# EAGLE board tulip breakout (EAGLE 9.6.2)
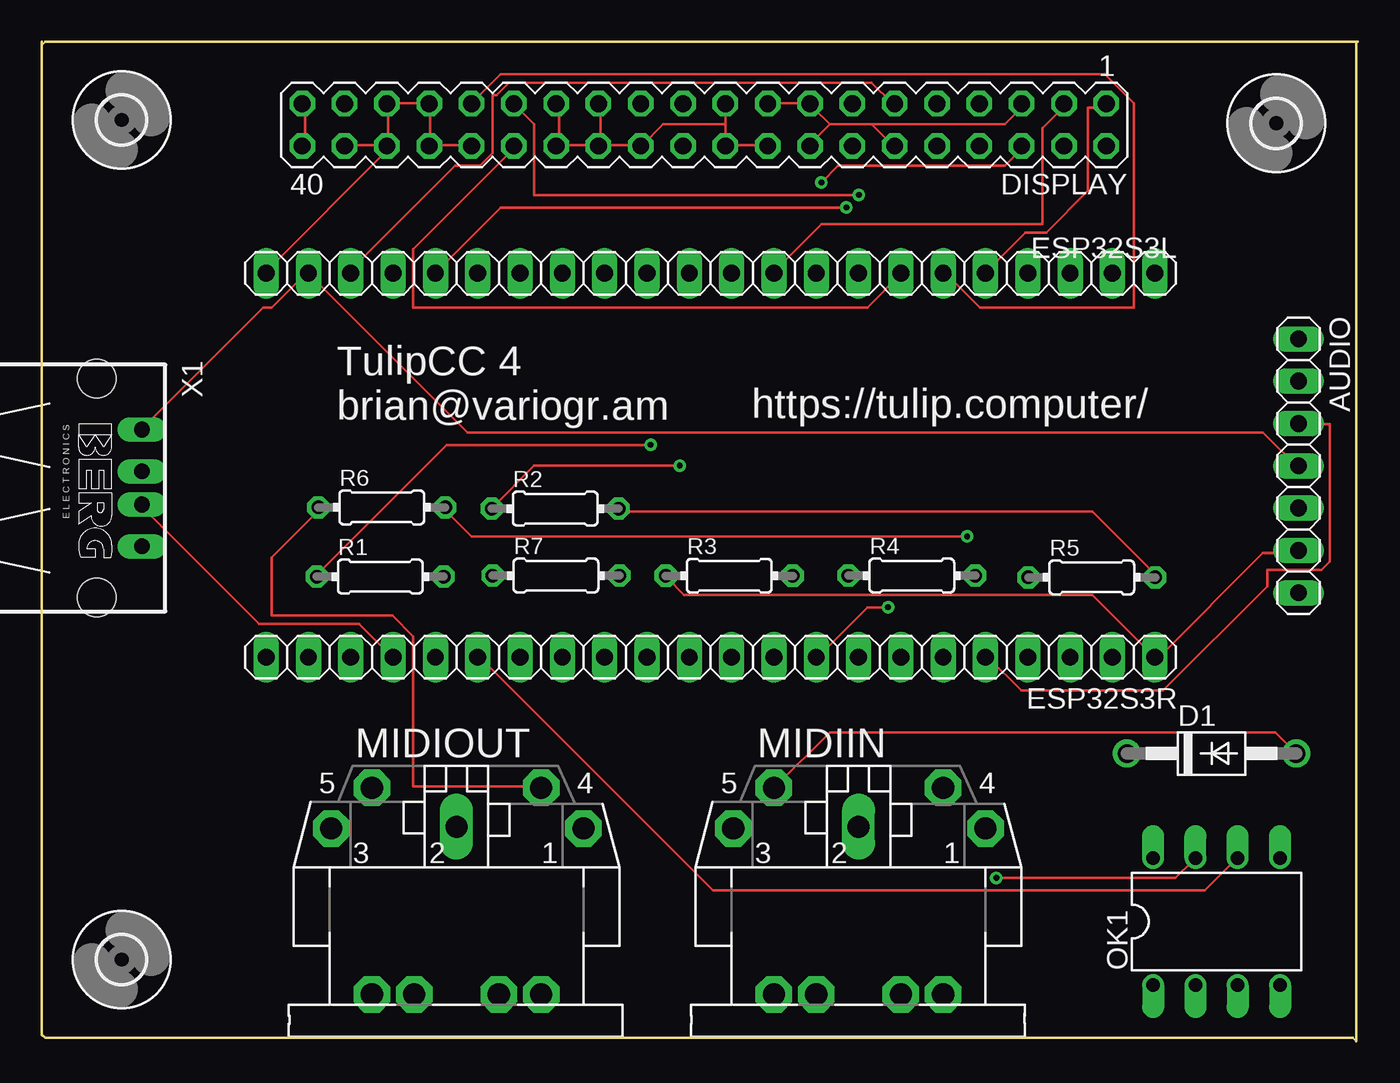
[diagram p0: board, top side]
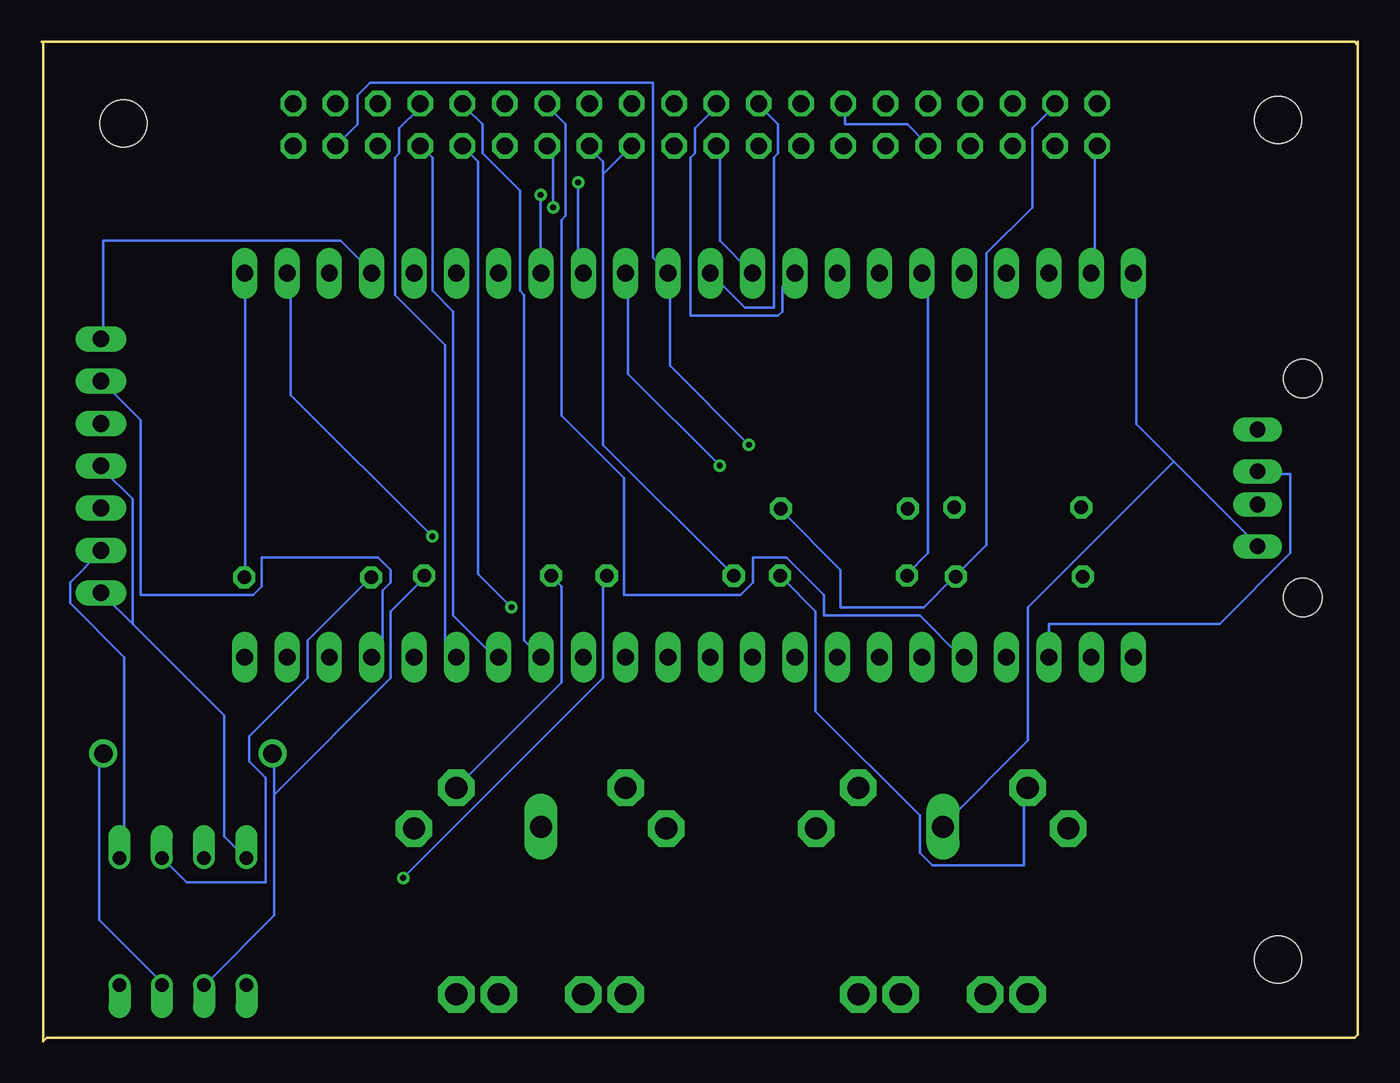
[diagram p1: board, bottom side, seen from below]

Size 79 x 60 mm. Coordinates in mm from the lower left corner, seen from the top.
Outline: 0,60 0,59.8
Outline: 0,59.8 0,0.4 0.2,0.2 78.7,0.2 78.9,0 78.9,59.9 79,60 0.2,60 0,59.8
Copper layers (1*16): Top 0.035mm / dielectric 0.15mm / Bottom 0.035mm
Design rules "default *": minimum track width 6mil, minimum drill 0.35mm, track to track 10mil, track to pad 10mil, pad to pad 10mil, via to via 10mil, smd to smd 10mil, copper to edge 40mil, drill to drill 6mil, minimum pad ring 10mil, minimum via ring 8mil, stop-mask expansion 4mil, vias tented up to drill 0mil, thermal gap 10mil

## Footprints (pad centres in the part's own frame; a part is rotated, then mirrored left to right if it is on the bottom)
1X07 = drill 1.016 long: 1 -7.62,0; 2 -5.08,0; 3 -2.54,0; 4 0,0; 5 2.54,0; 6 5.08,0; 7 7.62,0
DO41-10 = drill 1.118: A 5.08,0; C -5.08,0
MA20-2 = drill 1.016 octagon: 1 -24.13,-1.27; 2 -24.13,1.27; 3 -21.59,-1.27; 4 -21.59,1.27; 5 -19.05,-1.27; 6 -19.05,1.27; 7 -16.51,-1.27; 8 -16.51,1.27; 9 -13.97,-1.27; 10 -13.97,1.27; 11 -11.43,-1.27; 12 -11.43,1.27; 13 -8.89,-1.27; 14 -8.89,1.27; 15 -6.35,-1.27; 16 -6.35,1.27; 17 -3.81,-1.27; 18 -3.81,1.27; 19 -1.27,-1.27; 20 -1.27,1.27; 21 1.27,-1.27; 22 1.27,1.27; 23 3.81,-1.27; 24 3.81,1.27; 25 6.35,-1.27; 26 6.35,1.27; 27 8.89,-1.27; 28 8.89,1.27; 29 11.43,-1.27; 30 11.43,1.27; 31 13.97,-1.27; 32 13.97,1.27; 33 16.51,-1.27; 34 16.51,1.27; 35 19.05,-1.27; 36 19.05,1.27; 37 21.59,-1.27; 38 21.59,1.27; 39 24.13,-1.27; 40 24.13,1.27
1X22 = drill 1.016 long: 1 -26.67,0; 2 -24.13,0; 3 -21.59,0; 4 -19.05,0; 5 -16.51,0; 6 -13.97,0; 7 -11.43,0; 8 -8.89,0; 9 -6.35,0; 10 -3.81,0; 11 -1.27,0; 12 1.27,0; 13 3.81,0; 14 6.35,0; 15 8.89,0; 16 11.43,0; 17 13.97,0; 18 16.51,0; 19 19.05,0; 20 21.59,0; 21 24.13,0; 22 26.67,0
2,8 = hole 2.8: 0,0
CP-2350 = drill 1.321 pad 2.184 octagon: 1 7.62,12.58; 3 -7.52,12.58; 4 5.08,15.02; 5 -5.08,15.02; PE -2.54,2.62; PE1 -5.08,2.62; PE2 5.08,2.62; PE@ 2.54,2.62 | drill 1.321 long: 2 0,12.68
DIL08 = drill 0.813 offset: 1 -3.81,-3.81; 2 -1.27,-3.81; 3 1.27,-3.81; 4 3.81,-3.81; 5 3.81,3.81; 6 1.27,3.81; 7 -1.27,3.81; 8 -3.81,3.81
0204/7 = drill 0.813 octagon: 1 -3.81,0; 2 3.81,0
PN87520 = drill 0.95 long: 1 -3.5,2.71; 2 -1,2.71; 3 1,2.71; 4 3.5,2.71 | hole 2.3: -6.57,0; 6.57,0

## Placement (x,y rotation side)
AUDIO  [1X07]  75.44,34.54 270 top
D1  1N4004  [DO41-10]  70.22,17.27 0 top
DISPLAY  [MA20-2]  39.77,55.01 180 top
ESP32S3L  [1X22]  40.14,46.1 180 top
ESP32S3R  [1X22]  40.14,23.05 180 top
H1  MOUNT-HOLE2.8  [2,8]  4.8,4.9 0 top
H2  MOUNT-HOLE2.8  [2,8]  74.1,55.1 0 top
H3  MOUNT-HOLE2.8  [2,8]  4.8,55.3 0 top
MIDIIN  MIDIJACK  [CP-2350]  49.03,0.19 0 top
MIDIOUT  MIDIJACK  [CP-2350]  24.9,0.19 0 top
OK1  6N138  [DIL08]  70.52,7.18 0 top
R1  4.7K  [0204/7]  20.32,27.89 0 top
R2  4.7K  [0204/7]  30.82,31.97 0 top
R3  4.7K  [0204/7]  41.27,27.94 0 top
R4  220  [0204/7]  52.23,27.95 0 top
R5  470  [0204/7]  63.03,27.84 0 top
R6  33  [0204/7]  20.41,32.04 0 top
R7  10  [0204/7]  30.87,27.95 0 top
X1  [PN87520]  3.31,33.21 270 top

## Library data of the parts
AUDIO ESP32S3L ESP32S3R = pinhead
D1 = diode
DISPLAY = con-lstb; OC_FARNELL: unknown; OC_NEWARK: unknown
H1-H3 = holes
MIDIIN MIDIOUT = adafruit
OK1 = optocoupler; MF: VISHAY/TELEFUNKEN; MPN: 6N138; OC_FARNELL: 9860150; OC_NEWARK: 35K5294
R1-R7 = rcl; SPICEPREFIX: R
X1 = con-berg; OC_FARNELL: unknown; OC_NEWARK: unknown

## Nets
GND: AUDIO.6 DISPLAY.5 DISPLAY.12 DISPLAY.15 DISPLAY.16 DISPLAY.17 DISPLAY.18 DISPLAY.19 DISPLAY.20 DISPLAY.24 DISPLAY.25 DISPLAY.26 DISPLAY.27 DISPLAY.28 DISPLAY.32 DISPLAY.33 DISPLAY.34 DISPLAY.35 DISPLAY.36 DISPLAY.38 ESP32S3L.22 ESP32S3R.1 MIDIOUT.2 OK1.5 R3.1 X1.4
N$1: DISPLAY.6 ESP32S3L.9
N$2: DISPLAY.7 ESP32S3R.6
N$3: DISPLAY.8 ESP32S3R.7
N$4: DISPLAY.9 ESP32S3R.8
N$6: DISPLAY.10 ESP32S3R.9
N$7: DISPLAY.11 ESP32S3L.20
N$8: DISPLAY.13 ESP32S3R.18
N$9: DISPLAY.14 ESP32S3L.18
N$10: AUDIO.4 AUDIO.7 DISPLAY.39 DISPLAY.40 ESP32S3L.21 OK1.8 X1.1
N$11: DISPLAY.21 ESP32S3L.14
N$12: DISPLAY.22 ESP32S3L.13
N$13: DISPLAY.23 ESP32S3L.12
N$14: DISPLAY.29 ESP32S3L.8
N$15: DISPLAY.30 ESP32S3L.7
N$16: DISPLAY.31 ESP32S3L.6
N$17: DISPLAY.37 ESP32S3L.1 R1.2 R2.2 R5.2
N$18: DISPLAY.4 ESP32S3L.11 R1.1
N$19: ESP32S3R.17 OK1.6 R5.1
N$20: DISPLAY.1 ESP32S3L.5
N$21: AUDIO.1 ESP32S3L.4
N$22: AUDIO.2 ESP32S3R.4
N$23: AUDIO.3 ESP32S3R.5
N$24: ESP32S3R.20 X1.2
N$25: ESP32S3R.19 X1.3
N$26: DISPLAY.3 ESP32S3L.10 R2.1
N$27: ESP32S3L.17 R7.1
N$29: MIDIIN.4 R4.1
N$30: D1.C OK1.2 R4.2
N$31: D1.A MIDIIN.5 OK1.3
N$32: OK1.7 R3.2
N$34: MIDIOUT.5 R7.2
N$35: MIDIOUT.4 R6.1
N$36: ESP32S3L.2 R6.2

## Tracks (layer width: path | path; a pad name or v marks a point on that pad's centre or on a via)
GND
  Top 0.152: AUDIO.6 75.3,29.3 73.3,29.3 67.05,23.05 ESP32S3R.1 63.05,26.8 38.55,26.8 37.55,27.8 R3.1 | 49.8,55.05 51.05,53.8 DISPLAY.12 | 47.3,55.05 49.8,55.05 | 47.3,55.05 46.3,56.05 DISPLAY.15 46.05,56.3 43.8,56.3 DISPLAY.17 | 49.8,55.05 57.8,55.05 58.8,56.05 DISPLAY.5 | DISPLAY.38 18.3,53.8 20.55,53.8 DISPLAY.36 | 23.3,53.8 23.3,56.05 DISPLAY.33 23.05,56.3 20.8,56.3 DISPLAY.35 20.8,56.05 20.8,53.8 DISPLAY.36 | 23.3,53.8 25.8,53.8 DISPLAY.32 | 23.3,53.8 DISPLAY.34 | 31.05,53.8 31.05,56.05 DISPLAY.27 | 33.55,53.8 33.55,56.05 DISPLAY.25 | 33.55,53.8 35.8,53.8 DISPLAY.24 36.05,53.8 37.3,55.05 41.05,55.05 | 33.55,53.8 DISPLAY.26 33.3,53.8 31.05,53.8 | 31.05,53.8 DISPLAY.28 | 41.05,55.05 41.05,56.05 DISPLAY.19 | 41.05,55.05 41.05,53.8 | 41.05,53.8 43.55,53.8 DISPLAY.18 | 41.05,53.8 DISPLAY.20 | 47.3,55.05 46.05,53.8 DISPLAY.16 | ESP32S3L.22 13.55,46.3 20.8,53.55 DISPLAY.36
  Bottom 0.152: 11.05,34.8 13.3,37.05 13.3,46.05 ESP32S3L.22 | 11.05,34.8 6.05,29.8 X1.4 | 11.05,34.8 19.8,26.05 19.8,18.05 24.8,13.05 MIDIOUT.2 | OK1.5 74.3,11.05 74.05,11.3 74.05,23.05 77.3,26.3 77.3,27.55 75.55,29.3 AUDIO.6 | 45.3,52.05 45.3,52.8 46.05,53.55 DISPLAY.16 | 45.3,52.05 45.3,35.8 37.55,28.05 R3.1 | 45.3,52.05 43.8,53.55 DISPLAY.18 | DISPLAY.32 25.8,53.8 27.05,55.05 30.8,55.05 30.8,56.05 DISPLAY.27
N$1  (via drill 0.35)
  Top 0.152: v46.8,51.55 47.8,52.55 57.8,52.55 58.8,53.55 DISPLAY.6
  Bottom 0.152: v46.8,51.55 46.8,46.55 46.55,46.3 ESP32S3L.9
N$2
  Bottom 0.152: ESP32S3R.6 54.3,23.05 54.8,23.55 54.8,41.8 57.8,44.8 57.8,53.05 57.55,53.3 57.55,54.8 56.3,56.05 DISPLAY.7
N$3
  Bottom 0.152: ESP32S3R.7 51.8,23.05 54.3,25.55 54.3,43.8 55.55,45.05 55.55,53.05 56.05,53.55 DISPLAY.8
N$4
  Bottom 0.152: ESP32S3R.8 49.05,23.05 50.05,24.05 50.05,44.8 50.3,45.05 50.3,51.05 52.55,53.3 52.55,55.05 53.55,56.05 DISPLAY.9
N$6  (via drill 0.35)
  Top 0.152: v50.8,26.05 49.55,26.05 46.55,23.05 ESP32S3R.9
  Bottom 0.152: v50.8,26.05 52.8,28.05 52.8,52.8 DISPLAY.10
N$7
  Top 0.152: ESP32S3L.20 18.55,46.3 24.8,52.55 26.3,52.55 27.05,53.3 27.05,56.8 27.3,56.8 28.05,57.55 49.8,57.55 51.05,56.3 DISPLAY.11
N$8
  Bottom 0.152: ESP32S3R.18 23.8,23.05 26.3,25.55 32.05,25.55 32.05,26.8 34.3,29.05 36.3,29.05 36.3,27.55 37.05,26.8 44.05,26.8 44.05,33.8 47.8,37.55 47.8,49.3 47.55,49.55 47.55,55.05 48.55,56.05 DISPLAY.13
N$9  (via drill 0.35)
  Top 0.152: v48.3,50.05 27.55,50.05 23.8,46.3 ESP32S3L.18
  Bottom 0.152: v48.3,50.05 48.3,53.3 48.55,53.55 DISPLAY.14
N$10
  Top 0.152: DISPLAY.40 15.8,53.8 15.8,56.05 DISPLAY.39 | X1.1 6.05,36.8 13.3,44.05 13.8,44.05 15.8,46.05 ESP32S3L.21 16.05,46.05 25.55,36.55 73.3,36.55 75.3,34.55 AUDIO.4
  Bottom 0.152: DISPLAY.40 15.8,53.55 15.8,46.3 ESP32S3L.21 | 73.55,25.05 75.3,26.8 AUDIO.7 | 73.55,25.05 68.05,19.55 68.05,12.3 66.8,11.05 OK1.8 | 73.55,25.05 73.55,32.55 75.3,34.3 AUDIO.4
N$11
  Bottom 0.152: ESP32S3L.14 33.8,46.05 34.55,45.3 34.55,43.8 34.8,43.55 40.05,43.55 40.05,53.05 39.8,53.3 39.8,54.8 38.55,56.05 DISPLAY.21
N$12
  Bottom 0.152: ESP32S3L.13 36.55,46.3 38.3,48.05 38.3,53.55 DISPLAY.22
N$13
  Bottom 0.152: ESP32S3L.12 38.8,46.05 36.8,44.05 35.05,44.05 35.05,53.05 34.8,53.3 34.8,55.05 35.8,56.05 DISPLAY.23
N$14  (via drill 0.35)
  Top 0.152: v49.05,50.8 29.55,50.8 29.55,55.05 28.55,56.05 DISPLAY.29
  Bottom 0.152: v49.05,50.8 49.05,46.3 ESP32S3L.8
N$15
  Top 0.152: DISPLAY.30 28.3,53.55 22.3,47.55 22.3,44.05 49.55,44.05 51.55,46.05 ESP32S3L.7
N$16
  Top 0.152: DISPLAY.31 25.8,56.3 27.55,58.05 63.8,58.05 65.55,56.3 65.55,44.05 56.3,44.05 54.3,46.05 ESP32S3L.6
N$17
  Top 0.152: R5.2 66.8,28.05 63.05,31.8 34.8,31.8 R2.2
  Bottom 0.152: R5.2 66.8,28.05 66.8,46.05 ESP32S3L.1 | R2.2 34.55,31.8 31.05,28.3 31.05,26.05 26.05,26.05 24.3,27.8 R1.2 24.05,28.05 22.3,29.8 22.3,47.3 19.55,50.05 19.55,54.8 18.3,56.05 DISPLAY.37
N$18  (via drill 0.35)
  Top 0.152: v36.55,35.8 24.3,35.8 16.55,28.05 R1.1
  Bottom 0.152: v36.55,35.8 41.3,40.55 41.3,46.05 ESP32S3L.11 41.55,46.3 42.3,47.05 42.3,57.55 59.3,57.55 60.05,56.8 60.05,55.05 DISPLAY.4
N$19
  Top 0.152: ESP32S3R.17 26.3,23.05 40.3,9.05 69.8,9.05 71.55,10.8 OK1.6
  Bottom 0.152: OK1.6 71.55,10.8 70.3,9.55 65.55,9.55 65.55,15.8 66.55,16.8 66.55,18.3 63.05,21.8 63.05,24.05 59.3,27.8 R5.1
N$20
  Top 0.152: ESP32S3L.5 56.8,46.3 59.05,48.55 60.3,48.55 62.8,51.05 62.8,56.05 63.8,56.05 DISPLAY.1
N$21
  Bottom 0.152: ESP32S3L.4 59.3,46.3 61.05,48.05 75.3,48.05 75.3,42.3 AUDIO.1
N$22
  Bottom 0.152: ESP32S3R.4 59.05,23.05 58.55,23.55 58.55,27.05 58.05,27.55 58.05,28.3 58.8,29.05 65.8,29.05 65.8,27.3 66.3,26.8 73.05,26.8 73.05,37.3 75.3,39.55 AUDIO.2
N$23
  Top 0.152: ESP32S3R.5 56.8,23.05 58.8,21.05 67.3,21.05 73.55,27.3 73.55,28.3 76.8,28.3 77.3,28.8 77.3,37.05 75.55,37.05 AUDIO.3
N$24
  Bottom 0.152: ESP32S3R.20 18.55,25.05 8.3,25.05 4.05,29.3 4.05,34.05 5.8,34.05 X1.2
N$25
  Top 0.152: X1.3 6.05,32.05 13.05,25.05 19.05,25.05 21.05,23.05 ESP32S3R.19
N$26  (via drill 0.35)
  Top 0.152: v38.3,34.55 29.55,34.55 27.05,32.05 R2.1 | DISPLAY.3 61.3,56.05 60.05,54.8 60.05,49.05 46.8,49.05 44.05,46.3 ESP32S3L.10
  Bottom 0.152: v38.3,34.55 43.8,40.05 43.8,46.05 ESP32S3L.10
N$27
  Bottom 0.152: R7.1 27.05,28.05 25.8,29.3 25.8,45.8 26.05,46.05 ESP32S3L.17
N$29
  Bottom 0.152: R4.1 48.3,27.8 47.8,27.3 47.8,21.55 54.05,15.3 MIDIIN.4
N$30
  Bottom 0.152: 65.05,14.8 65.05,17.05 D1.C | 65.05,14.8 65.05,7.55 69.05,3.55 OK1.2 | 65.05,14.8 58.05,21.8 58.05,25.8 56.05,27.8 R4.2
N$31
  Top 0.152: MIDIIN.5 44.05,15.3 47.3,18.55 74.05,18.55 75.3,17.3 D1.A
  Bottom 0.152: OK1.3 71.8,3.55 75.55,7.3 75.55,16.8 75.3,17.05 D1.A
N$32  (via drill 0.35)
  Top 0.152: v57.3,9.8 68.05,9.8 69.05,10.8 OK1.7
  Bottom 0.152: v57.3,9.8 45.3,21.8 45.3,27.8 R3.2
N$34
  Bottom 0.152: R7.2 34.55,27.8 32.55,25.8 32.55,19.8 26.3,13.55 26.3,11.3 25.55,10.55 20.05,10.55 20.05,15.05 MIDIOUT.5
N$35
  Top 0.152: R6.1 16.55,31.8 13.8,29.05 13.8,25.55 21.05,25.55 22.3,24.3 22.3,15.3 29.8,15.3 MIDIOUT.4
N$36  (via drill 0.35)
  Top 0.152: v55.55,30.3 25.8,30.3 24.3,31.8 R6.2
  Bottom 0.152: v55.55,30.3 64.05,38.8 64.05,46.05 ESP32S3L.2

## Text on the board
tPlace: TulipCC 4 / brian@variogr.am | https://tulip.computer/